# EAGLE board PushButton_RGB_w_Test_Old (EAGLE 9.6.2)

Size 100 x 80 mm. Coordinates in mm from the lower left corner, seen from the top.
Outline: 0,0 100,0 100,80 0,80 0,0
Copper layers (1*16): Top 0.035mm / dielectric 1.5mm / Bottom 0.035mm
Design rules "default *": minimum track width 6mil, minimum drill 0.35mm, track to track 6mil, track to pad 6mil, pad to pad 6mil, via to via 6mil, smd to smd 6mil, copper to edge 40mil, drill to drill 6mil, minimum pad ring 10mil, minimum via ring 8mil, stop-mask expansion 4mil, vias tented up to drill 0.5mm, thermal gap 10mil

## Footprints (pad centres in the part's own frame; a part is rotated, then mirrored left to right if it is on the bottom)
CON-HARTING-ML_ML10 = drill 0.914 pad 1.778 square: 1 -5.08,-1.27 | drill 0.914 pad 1.93 octagon: 2 -5.08,1.27; 3 -2.54,-1.27; 4 -2.54,1.27; 5 0,-1.27; 6 0,1.27; 7 2.54,-1.27; 8 2.54,1.27; 9 5.08,-1.27; 10 5.08,1.27
CON-HARTING-ML_ML6 = drill 0.914 pad 1.778 square: 1 -2.54,-1.27 | drill 0.914 pad 1.778 octagon: 2 -2.54,1.27; 3 0,-1.27; 4 0,1.27; 5 2.54,-1.27; 6 2.54,1.27
C0603 = smd 1.1 x 1: 1 -0.85,0; 2 0.85,0
D/7343-31W = smd 2.95 x 2.7: + 3.375,0; - -3.375,0
DIO_LL4148 = smd 0.6 x 1.65: A 1.95,0; C -1.95,0
SJ_2S-NO = smd 0.635 x 1.27: 1 -0.45,0; 2 0.45,0
1X02 = drill 1.016 pad 1.88: 1 0,0; 2 2.54,0
3,0 = hole 3: 0,0
SO16 = smd 0.66 x 2.032: 1 -4.445,-3.073; 2 -3.175,-3.073; 3 -1.905,-3.073; 4 -0.635,-3.073; 5 0.635,-3.073; 6 1.905,-3.073; 7 3.175,-3.073; 8 4.445,-3.073; 9 4.445,3.073; 10 3.175,3.073; 11 1.905,3.073; 12 0.635,3.073; 13 -0.635,3.073; 14 -1.905,3.073; 15 -3.175,3.073; 16 -4.445,3.073
SO14 = smd 0.66 x 2.032: 1 -3.81,-3.073; 2 -2.54,-3.073; 3 -1.27,-3.073; 4 0,-3.073; 5 1.27,-3.073; 6 2.54,-3.073; 7 3.81,-3.073; 8 3.81,3.073; 9 2.54,3.073; 10 1.27,3.073; 11 0,3.073; 12 -1.27,3.073; 13 -2.54,3.073; 14 -3.81,3.073
CON-HARTING-ML_ML08 = drill 0.914 pad 1.778 square: 1 -5.08,-1.27 | drill 0.914 pad 1.778 octagon: 2 -5.08,1.27; 3 -2.54,-1.27; 4 -2.54,1.27; 5 0,-1.27; 6 0,1.27; 7 2.54,-1.27; 8 2.54,1.27
LED3MM = drill 0.813 octagon: A -1.27,0; K 1.27,0
R0603 = smd 1 x 1.1: 1 -0.85,0; 2 0.85,0
RGBLED5050 = smd 2 x 1.1: 1 -2,1.7; 2 -2,0; 3 -2,-1.7; 4 2,-1.7; 5 2,0; 6 2,1.7
B3F-10XX_SMD = smd 2.184 x 1.067: 1 -4.55,2.25; 2 4.55,2.25; 3 -4.55,-2.25; 4 4.55,-2.25
SOP8 = smd 0.6 x 1.6: 1 -1.905,-2.6; 2 -0.635,-2.6; 3 0.635,-2.6; 4 1.905,-2.6; 5 1.905,2.6; 6 0.635,2.6; 7 -0.635,2.6; 8 -1.905,2.6

## Placement (x,y rotation side)
BUT10  [CON-HARTING-ML_ML10]  81.28,38.1 90 top
BUT+6  [CON-HARTING-ML_ML6]  1.27,-824.23 0 top  (outside the outline)
C1  100n  [C0603]  13.34,19.05 90 top
C2  100n  [C0603]  3.81,-408.94 0 top  (outside the outline)
C3  100n  [C0603]  3.81,-439.42 0 top  (outside the outline)
C4  100n  [C0603]  3.81,-469.9 0 top  (outside the outline)
C5  100n  [C0603]  3.81,-500.38 0 top  (outside the outline)
C6  100n  [C0603]  3.81,-530.86 0 top  (outside the outline)
C7  100n  [C0603]  3.81,-561.34 0 top  (outside the outline)
C8  100n  [C0603]  3.81,-591.82 0 top  (outside the outline)
C9  100n  [C0603]  3.81,-622.3 0 top  (outside the outline)
C10  100n  [C0603]  59.05,41.91 90 top
C11  100n  [C0603]  72.39,12.06 0 top
C12  100n  [C0603]  73.03,49.53 0 top
C13  100uF  [D/7343-31W]  30.48,12.7 0 top
C14  100n  [C0603]  3.81,-652.78 0 top  (outside the outline)
C15  100n  [C0603]  3.81,-683.26 0 top  (outside the outline)
C16  100n  [C0603]  3.81,-713.74 0 top  (outside the outline)
C17  100n  [C0603]  3.81,-744.22 0 top  (outside the outline)
C18  100n  [C0603]  3.81,-774.7 0 top  (outside the outline)
C19  100n  [C0603]  3.81,-805.18 0 top  (outside the outline)
D0  LL4148  [DIO_LL4148]  -3.81,-278.13 0 top  (outside the outline)
D1  LL4148  [DIO_LL4148]  -3.81,-284.48 0 top  (outside the outline)
D2  LL4148  [DIO_LL4148]  -3.81,-290.83 0 top  (outside the outline)
D3  LL4148  [DIO_LL4148]  -3.81,-297.18 0 top  (outside the outline)
D4  LL4148  [DIO_LL4148]  -3.81,-303.53 0 top  (outside the outline)
D5  LL4148  [DIO_LL4148]  -3.81,-309.88 0 top  (outside the outline)
D6  LL4148  [DIO_LL4148]  -3.81,-316.23 0 top  (outside the outline)
D7  LL4148  [DIO_LL4148]  -3.81,-322.58 0 top  (outside the outline)
D8  LL4148  [DIO_LL4148]  -3.81,-328.93 0 top  (outside the outline)
D9  LL4148  [DIO_LL4148]  -3.81,-335.28 0 top  (outside the outline)
D10  LL4148  [DIO_LL4148]  -3.81,-341.63 0 top  (outside the outline)
D11  LL4148  [DIO_LL4148]  -3.81,-347.98 0 top  (outside the outline)
D12  LL4148  [DIO_LL4148]  -3.81,-354.33 0 top  (outside the outline)
D13  LL4148  [DIO_LL4148]  -3.81,-360.68 0 top  (outside the outline)
D14  LL4148  [DIO_LL4148]  -3.81,-367.03 0 top  (outside the outline)
D15  LL4148  [DIO_LL4148]  -3.81,-373.38 0 top  (outside the outline)
D16  LL4148  [DIO_LL4148]  -3.81,-379.73 0 top  (outside the outline)
D17  LL4148  [DIO_LL4148]  -3.81,-831.85 0 top  (outside the outline)
D18  LL4148  [DIO_LL4148]  -3.81,-838.2 0 top  (outside the outline)
D19  LL4148  [DIO_LL4148]  -3.81,-844.55 0 top  (outside the outline)
D20  LL4148  [DIO_LL4148]  -3.81,-850.9 0 top  (outside the outline)
D21  LL4148  [DIO_LL4148]  -3.81,-857.25 0 top  (outside the outline)
D22  LL4148  [DIO_LL4148]  -3.81,-863.6 0 top  (outside the outline)
D23  LL4148  [DIO_LL4148]  -3.81,-869.95 0 top  (outside the outline)
D24  LL4148  [DIO_LL4148]  -3.81,-876.3 0 top  (outside the outline)
D25  LL4148  [DIO_LL4148]  -3.81,-882.65 0 top  (outside the outline)
D26  LL4148  [DIO_LL4148]  -3.81,-889 0 top  (outside the outline)
D27  LL4148  [DIO_LL4148]  -3.81,-895.35 0 top  (outside the outline)
D28  LL4148  [DIO_LL4148]  -3.81,-901.7 0 top  (outside the outline)
D29  LL4148  [DIO_LL4148]  -3.81,-908.05 0 top  (outside the outline)
D30  LL4148  [DIO_LL4148]  -3.81,-914.4 0 top  (outside the outline)
D31  LL4148  [DIO_LL4148]  -3.81,-920.75 0 top  (outside the outline)
D32  LL4148  [DIO_LL4148]  -3.81,-927.1 0 top  (outside the outline)
END  SOLDERJUMPERNO  [SJ_2S-NO]  5.08,35.56 180 top
END1  SOLDERJUMPERNO  [SJ_2S-NO]  5.08,27.94 0 top
END1_PIN  END1  [1X02]  3.81,30.48 0 top
END_PIN  END  [1X02]  6.35,38.1 180 top
H1  MOUNT-HOLE3.0  [3,0]  5.08,5.37 0 top
H2  MOUNT-HOLE3.0  [3,0]  4.45,53.98 0 top
H3  MOUNT-HOLE3.0  [3,0]  81.92,53.98 0 top
H4  MOUNT-HOLE3.0  [3,0]  81.28,3.81 0 top
IC1  4017D  [SO16]  72.39,42.55 90 top
IC2  4011D  [SO14]  72.39,19.05 90 top
IC3  4017D  [SO16]  1.27,-251.46 0 top  (outside the outline)
INP  [CON-HARTING-ML_ML08]  5.08,20.32 90 top
LED1  green  [LED3MM]  20.1,12.7 0 top
OUTP  [CON-HARTING-ML_ML08]  81.28,20.32 90 top
R1  470  [R0603]  13.34,15.24 270 top
R2  470  [R0603]  10.16,-408.94 0 top  (outside the outline)
R3  470  [R0603]  10.16,-439.42 0 top  (outside the outline)
R4  470  [R0603]  10.16,-469.9 0 top  (outside the outline)
R5  470  [R0603]  10.16,-500.38 0 top  (outside the outline)
R6  470  [R0603]  10.16,-530.86 0 top  (outside the outline)
R7  470  [R0603]  10.16,-561.34 0 top  (outside the outline)
R8  470  [R0603]  10.16,-591.82 0 top  (outside the outline)
R9  470  [R0603]  10.16,-622.3 0 top  (outside the outline)
R10  470  [R0603]  59.05,38.1 270 top
R11  470  [R0603]  10.16,-652.78 0 top  (outside the outline)
R12  470  [R0603]  10.16,-683.26 0 top  (outside the outline)
R13  470  [R0603]  10.16,-713.74 0 top  (outside the outline)
R14  470  [R0603]  10.16,-744.22 0 top  (outside the outline)
R15  470  [R0603]  10.16,-774.7 0 top  (outside the outline)
R16  470  [R0603]  10.16,-805.18 0 top  (outside the outline)
R20  470  [R0603]  14.82,12.7 0 top
RGB1  RGBLED5050  [RGBLED5050]  20.19,5.58 90 top
RGB2  RGBLED5050  [RGBLED5050]  -3.81,-401.32 0 top  (outside the outline)
RGB3  RGBLED5050  [RGBLED5050]  -3.81,-431.8 0 top  (outside the outline)
RGB4  RGBLED5050  [RGBLED5050]  -3.81,-462.28 0 top  (outside the outline)
RGB5  RGBLED5050  [RGBLED5050]  -3.81,-492.76 0 top  (outside the outline)
RGB6  RGBLED5050  [RGBLED5050]  -3.81,-523.24 0 top  (outside the outline)
RGB7  RGBLED5050  [RGBLED5050]  -3.81,-553.72 0 top  (outside the outline)
RGB8  RGBLED5050  [RGBLED5050]  -3.81,-584.2 0 top  (outside the outline)
RGB9  RGBLED5050  [RGBLED5050]  -3.81,-614.68 0 top  (outside the outline)
RGB10  RGBLED5050  [RGBLED5050]  69.85,67.31 270 top
RGB11  RGBLED5050  [RGBLED5050]  -3.81,-645.16 0 top  (outside the outline)
RGB12  RGBLED5050  [RGBLED5050]  -3.81,-675.64 0 top  (outside the outline)
RGB13  RGBLED5050  [RGBLED5050]  -3.81,-706.12 0 top  (outside the outline)
RGB14  RGBLED5050  [RGBLED5050]  -3.81,-736.6 0 top  (outside the outline)
RGB15  RGBLED5050  [RGBLED5050]  -3.81,-767.08 0 top  (outside the outline)
RGB16  RGBLED5050  [RGBLED5050]  -3.81,-797.56 0 top  (outside the outline)
S1  [B3F-10XX_SMD]  13.58,5.41 90 top
S2  [B3F-10XX_SMD]  11.43,-401.32 0 top  (outside the outline)
S3  [B3F-10XX_SMD]  11.43,-431.8 0 top  (outside the outline)
S4  [B3F-10XX_SMD]  11.43,-462.28 0 top  (outside the outline)
S5  [B3F-10XX_SMD]  11.43,-492.76 0 top  (outside the outline)
S6  [B3F-10XX_SMD]  11.43,-523.24 0 top  (outside the outline)
S7  [B3F-10XX_SMD]  11.43,-553.72 0 top  (outside the outline)
S8  [B3F-10XX_SMD]  11.43,-584.2 0 top  (outside the outline)
S9  [B3F-10XX_SMD]  11.43,-614.68 0 top  (outside the outline)
S10  [B3F-10XX_SMD]  63.5,67.31 90 top
S11  [B3F-10XX_SMD]  11.43,-645.16 0 top  (outside the outline)
S12  [B3F-10XX_SMD]  11.43,-675.64 0 top  (outside the outline)
S13  [B3F-10XX_SMD]  11.43,-706.12 0 top  (outside the outline)
S14  [B3F-10XX_SMD]  11.43,-736.6 0 top  (outside the outline)
S15  [B3F-10XX_SMD]  11.43,-767.08 0 top  (outside the outline)
S16  [B3F-10XX_SMD]  11.43,-797.56 0 top  (outside the outline)
SV1  [CON-HARTING-ML_ML6]  17.14,27.94 270 top
SV2  [CON-HARTING-ML_ML6]  1.27,-391.16 0 top  (outside the outline)
SV3  [CON-HARTING-ML_ML6]  1.27,-421.64 0 top  (outside the outline)
SV4  [CON-HARTING-ML_ML6]  1.27,-452.12 0 top  (outside the outline)
SV5  [CON-HARTING-ML_ML6]  1.27,-482.6 0 top  (outside the outline)
SV6  [CON-HARTING-ML_ML6]  1.27,-513.08 0 top  (outside the outline)
SV7  [CON-HARTING-ML_ML6]  1.27,-543.56 0 top  (outside the outline)
SV8  [CON-HARTING-ML_ML6]  1.27,-574.04 0 top  (outside the outline)
SV9  [CON-HARTING-ML_ML6]  1.27,-604.52 0 top  (outside the outline)
SV10  [CON-HARTING-ML_ML6]  62.87,49.53 270 top
SV11  [CON-HARTING-ML_ML6]  1.27,-635 0 top  (outside the outline)
SV12  [CON-HARTING-ML_ML6]  1.27,-665.48 0 top  (outside the outline)
SV13  [CON-HARTING-ML_ML6]  1.27,-695.96 0 top  (outside the outline)
SV14  [CON-HARTING-ML_ML6]  1.27,-726.44 0 top  (outside the outline)
SV15  [CON-HARTING-ML_ML6]  1.27,-756.92 0 top  (outside the outline)
SV16  [CON-HARTING-ML_ML6]  1.27,-787.4 0 top  (outside the outline)
SW0  [1X02]  -5.08,-814.07 0 top  (outside the outline)
TST_LED  SOLDERJUMPERNO  [SJ_2S-NO]  -5.08,-245.11 0 top  (outside the outline)
TST_LED1  Tst_LED  [1X02]  -5.08,-238.76 0 top  (outside the outline)
U1  [SOP8]  17.78,19.05 180 top
U2  [SOP8]  -1.27,-410.21 0 top  (outside the outline)
U3  [SOP8]  -1.27,-440.69 0 top  (outside the outline)
U4  [SOP8]  -1.27,-471.17 0 top  (outside the outline)
U5  [SOP8]  -1.27,-501.65 0 top  (outside the outline)
U6  [SOP8]  -1.27,-532.13 0 top  (outside the outline)
U7  [SOP8]  -1.27,-562.61 0 top  (outside the outline)
U8  [SOP8]  -1.27,-593.09 0 top  (outside the outline)
U9  [SOP8]  -1.27,-623.57 0 top  (outside the outline)
U10  [SOP8]  63.5,41.27 180 top
U11  [SOP8]  -1.27,-654.05 0 top  (outside the outline)
U12  [SOP8]  -1.27,-684.53 0 top  (outside the outline)
U13  [SOP8]  -1.27,-715.01 0 top  (outside the outline)
U14  [SOP8]  -1.27,-745.49 0 top  (outside the outline)
U15  [SOP8]  -1.27,-775.97 0 top  (outside the outline)
U16  [SOP8]  -1.27,-806.45 0 top  (outside the outline)

## Library data of the parts
BUT10 INP OUTP = PushButtonAction_4017_2; OC_FARNELL: unknown; OC_NEWARK: unknown
BUT+6 SV1-SV16 = PushButtonAction_4017_4; OC_FARNELL: unknown; OC_NEWARK: unknown
C1-C19 = rcl; SPICEPREFIX: C
D0 D1-D32 = LL4148; AVAILABILITY: In Stock; DESCRIPTION: Diode Standard 75V 300mA (DC) Surface Mount Mini MELF/DL-35; MF: ON; MP: LL4148; PACKAGE: SOD-80 Fairchild Semiconductor; PRICE: None
END END1 TST_LED = SparkFun-Retired
END1_PIN END_PIN SW0 TST_LED1 = SparkFun-Connectors
H1-H4 = holes
IC1 IC3 = 40xx
IC2 = 40xx; SPICEPREFIX: J
LED1 = led
R1-R16 R20 = rcl; SPICEPREFIX: R
RGB1-RGB16 = adafruit
S1-S16 = switch-omron
U1-U16 = S3PO_Modul_WS2811

## Nets
+5V: C11.1 C12.1 C13.+ IC1.16 IC2.14 IC3.16 INP.3 OUTP.3 R1.2 R2.2 R3.2 R4.2 R5.2 R6.2 R7.2 R8.2 R9.2 R10.2 R11.2 R12.2 R13.2 R14.2 R15.2 R16.2 R20.2 SV1.1 SV2.1 SV3.1 SV4.1 SV5.1 SV6.1 SV7.1 SV8.1 SV9.1 SV10.1 SV11.1 SV12.1 SV13.1 SV14.1 SV15.1 SV16.1 TST_LED1.2 TST_LED.1
BUTTONS: INP.7 OUTP.7 S1.1 S1.2 S2.2 S3.2 S4.2 S5.2 S6.2 S7.2 S8.2 S9.2 S10.2 S11.2 S12.2 S13.2 S14.2 S15.2 S16.2 SV1.2 SV2.2 SV3.2 SV4.2 SV5.2 SV6.2 SV7.2 SV8.2 SV9.2 SV10.2 SV11.2 SV12.2 SV13.2 SV14.2 SV15.2 SV16.2 SW0.1
CLK_IN: IC1.14 IC2.2 INP.5
CLK_NEXT_CHAIN: END1.2 END1_PIN.1 INP.8 OUTP.8
CLK_OUT: END1.1 END1_PIN.2 IC2.11 OUTP.5
DIN: INP.1 U1.6
GND: C1.2 C2.2 C3.2 C4.2 C5.2 C6.2 C7.2 C8.2 C9.2 C10.2 C11.2 C12.2 C13.- C14.2 C15.2 C16.2 C17.2 C18.2 C19.2 IC1.8 IC2.7 IC3.8 INP.4 LED1.K OUTP.4 U1.4 U2.4 U3.4 U4.4 U5.4 U6.4 U7.4 U8.4 U9.4 U10.4 U11.4 U12.4 U13.4 U14.4 U15.4 U16.4
N$1: IC2.3 IC2.5 IC2.6
N$2: U10.5 U11.6
N$3: BUT+6.1 D9.A IC3.2
N$4: U1.5 U2.6
N$5: BUT10.10 IC1.11 IC1.13 IC2.1
N$6: C2.1 R2.1 U2.8
N$7: D0.C SW0.2
N$8: RGB2.4 SV2.4 U2.3
N$9: RGB2.6 SV2.6 U2.1
N$10: RGB2.5 SV2.3 U2.2
N$11: BUT10.2 D1.A IC1.2
N$12: BUT10.3 D2.A IC1.4
N$13: BUT10.4 D3.A IC1.7
N$14: BUT10.5 D4.A IC1.10
N$15: BUT10.6 D5.A IC1.1
N$16: BUT10.7 D6.A IC1.5
N$17: BUT10.8 D7.A IC1.6
N$18: BUT10.9 D8.A IC1.9
N$19: RGB1.5 SV1.3 U1.2
N$20: D18.A D20.A D22.A D24.A D26.A D28.A D30.A D32.A TST_LED1.1 TST_LED.2
N$21: LED1.A R20.1
N$22: D17.A D18.C
N$23: S2.1
N$24: U2.5 U3.6
N$25: D10.C S10.3 S10.4 SV10.5
N$26: RGB1.4 SV1.4 U1.3
N$27: RGB1.6 SV1.6 U1.1
N$28: BUT+6.2 D10.A IC3.4
N$29: BUT+6.3 D11.A IC3.7
N$30: BUT+6.4 D12.A IC3.10
N$31: BUT+6.5 D13.A IC3.1
N$33: BUT+6.6 D14.A IC3.5
N$35: BUT10.1 D0.A IC1.3
N$36: D15.A IC3.6
N$37: D16.A IC3.9
N$38: IC2.10 IC2.12 IC2.13
N$39: D19.A D20.C
N$40: IC2.8 IC3.11 IC3.13
N$41: IC2.4 IC2.9 IC3.14
N$43: D21.A D22.C
N$45: C3.1 R3.1 U3.8
N$46: D3.C S3.3 S3.4 SV3.5
N$47: RGB3.4 SV3.4 U3.3
N$48: RGB3.6 SV3.6 U3.1
N$49: RGB3.5 SV3.3 U3.2
N$50: D19.C RGB3.1 RGB3.2 RGB3.3 RGB4.1 RGB4.2 RGB4.3
N$51: S3.1
N$52: U3.5 U4.6
N$53: D23.A D24.C
N$55: D25.A D26.C
N$56: C4.1 R4.1 U4.8
N$58: RGB4.4 SV4.4 U4.3
N$59: RGB4.6 SV4.6 U4.1
N$60: RGB4.5 SV4.3 U4.2
N$62: S4.1
N$63: U4.5 U5.6
N$64: D27.A D28.C
N$66: D29.A D30.C
N$67: C5.1 R5.1 U5.8
N$69: RGB5.4 SV5.4 U5.3
N$70: RGB5.6 SV5.6 U5.1
N$71: RGB5.5 SV5.3 U5.2
N$72: D21.C RGB5.1 RGB5.2 RGB5.3 RGB6.1 RGB6.2 RGB6.3
N$73: S5.1
N$74: D31.A D32.C
N$75: U5.5 U6.6
N$76: C1.1 R1.1 U1.8
N$80: C6.1 R6.1 U6.8
N$82: RGB6.4 SV6.4 U6.3
N$83: RGB6.6 SV6.6 U6.1
N$84: RGB6.5 SV6.3 U6.2
N$86: S6.1
N$87: U6.5 U7.6
N$91: C7.1 R7.1 U7.8
N$93: C10.1 R10.1 U10.8
N$95: END.2 END_PIN.1 OUTP.1
N$96: RGB7.4 SV7.4 U7.3
N$97: RGB7.6 SV7.6 U7.1
N$98: RGB7.5 SV7.3 U7.2
N$99: D23.C RGB7.1 RGB7.2 RGB7.3 RGB8.1 RGB8.2 RGB8.3
N$100: S7.1
N$101: U7.5 U8.6
N$105: C8.1 R8.1 U8.8
N$107: RGB8.4 SV8.4 U8.3
N$108: RGB8.6 SV8.6 U8.1
N$109: RGB8.5 SV8.3 U8.2
N$111: S8.1
N$112: U8.5 U9.6
N$116: RGB10.4 SV10.4 U10.3
N$117: RGB10.6 SV10.6 U10.1
N$118: RGB10.5 SV10.3 U10.2
N$119: C15.1 R12.1 U12.8
N$120: D1.C S1.3 S1.4 SV1.5
N$121: D2.C S2.3 S2.4 SV2.5
N$123: D4.C S4.3 S4.4 SV4.5
N$124: D5.C S5.3 S5.4 SV5.5
N$125: D6.C S6.3 S6.4 SV6.5
N$126: D7.C S7.3 S7.4 SV7.5
N$127: D8.C S8.3 S8.4 SV8.5
N$128: C9.1 R9.1 U9.8
N$129: D17.C RGB1.1 RGB1.2 RGB1.3 RGB2.1 RGB2.2 RGB2.3
N$130: D12.C S12.3 S12.4 SV12.5
N$132: D9.C S9.3 S9.4 SV9.5
N$133: S10.1
N$134: RGB12.4 SV12.4 U12.3
N$136: RGB9.4 SV9.4 U9.3
N$137: RGB9.6 SV9.6 U9.1
N$138: RGB9.5 SV9.3 U9.2
N$139: D25.C RGB9.1 RGB9.2 RGB9.3 RGB10.1 RGB10.2 RGB10.3
N$140: S9.1
N$141: U9.5 U10.6
N$145: C14.1 R11.1 U11.8
N$146: D11.C S11.3 S11.4 SV11.5
N$147: RGB11.4 SV11.4 U11.3
N$148: RGB11.6 SV11.6 U11.1
N$149: RGB11.5 SV11.3 U11.2
N$151: S11.1
N$152: U11.5 U12.6
N$155: RGB12.6 SV12.6 U12.1
N$156: RGB12.5 SV12.3 U12.2
N$157: D27.C RGB11.1 RGB11.2 RGB11.3 RGB12.1 RGB12.2 RGB12.3
N$158: S12.1
N$159: U12.5 U13.6
N$163: C16.1 R13.1 U13.8
N$164: D13.C S13.3 S13.4 SV13.5
N$165: RGB13.4 SV13.4 U13.3
N$166: RGB13.6 SV13.6 U13.1
N$167: RGB13.5 SV13.3 U13.2
N$168: D29.C RGB13.1 RGB13.2 RGB13.3 RGB14.1 RGB14.2 RGB14.3
N$169: S13.1
N$170: U13.5 U14.6
N$174: C17.1 R14.1 U14.8
N$175: D14.C S14.3 S14.4 SV14.5
N$176: RGB14.4 SV14.4 U14.3
N$177: RGB14.6 SV14.6 U14.1
N$178: RGB14.5 SV14.3 U14.2
N$180: S14.1
N$181: U14.5 U15.6
N$185: C18.1 R15.1 U15.8
N$186: D15.C S15.3 S15.4 SV15.5
N$187: RGB15.4 SV15.4 U15.3
N$188: RGB15.6 SV15.6 U15.1
N$189: RGB15.5 SV15.3 U15.2
N$190: D31.C RGB15.1 RGB15.2 RGB15.3 RGB16.1 RGB16.2 RGB16.3
N$191: S15.1
N$192: U15.5 U16.6
N$196: C19.1 R16.1 U16.8
N$197: D16.C S16.3 S16.4 SV16.5
N$198: RGB16.4 SV16.4 U16.3
N$199: RGB16.6 SV16.6 U16.1
N$200: RGB16.5 SV16.3 U16.2
N$202: S16.1
N$203: U16.5
RESET: IC1.15 IC3.15 INP.6 OUTP.6
RETURN: END.1 END_PIN.2 INP.2 OUTP.2

## Tracks (layer width: path | path; a pad name or v marks a point on that pad's centre or on a via)
+5V  (42 unrouted)
BUTTONS  (35 unrouted)
CLK_IN  (2 unrouted)
CLK_NEXT_CHAIN  (3 unrouted)
CLK_OUT  (3 unrouted)
DIN  (1 unrouted)
GND  (40 unrouted)
N$1  (2 unrouted)
N$2  (1 unrouted)
N$3  (2 unrouted)
N$4  (1 unrouted)
N$5  (3 unrouted)
N$6  (2 unrouted)
N$7  (1 unrouted)
N$8  (2 unrouted)
N$9  (2 unrouted)
N$10  (2 unrouted)
N$11  (2 unrouted)
N$12  (2 unrouted)
N$13  (2 unrouted)
N$14  (2 unrouted)
N$15  (2 unrouted)
N$16  (2 unrouted)
N$17  (2 unrouted)
N$18  (2 unrouted)
N$19  (2 unrouted)
N$20  (9 unrouted)
N$21  (1 unrouted)
N$22  (1 unrouted)
N$24  (1 unrouted)
N$25  (3 unrouted)
N$26  (2 unrouted)
N$27  (2 unrouted)
N$28  (2 unrouted)
N$29  (2 unrouted)
N$30  (2 unrouted)
N$31  (2 unrouted)
N$33  (2 unrouted)
N$35  (2 unrouted)
N$36  (1 unrouted)
N$37  (1 unrouted)
N$38  (2 unrouted)
N$39  (1 unrouted)
N$40  (2 unrouted)
N$41  (2 unrouted)
N$43  (1 unrouted)
N$45  (2 unrouted)
N$46  (3 unrouted)
N$47  (2 unrouted)
N$48  (2 unrouted)
N$49  (2 unrouted)
N$50  (6 unrouted)
N$52  (1 unrouted)
N$53  (1 unrouted)
N$55  (1 unrouted)
N$56  (2 unrouted)
N$58  (2 unrouted)
N$59  (2 unrouted)
N$60  (2 unrouted)
N$63  (1 unrouted)
N$64  (1 unrouted)
N$66  (1 unrouted)
N$67  (2 unrouted)
N$69  (2 unrouted)
N$70  (2 unrouted)
N$71  (2 unrouted)
N$72  (6 unrouted)
N$74  (1 unrouted)
N$75  (1 unrouted)
N$76  (2 unrouted)
N$80  (2 unrouted)
N$82  (2 unrouted)
N$83  (2 unrouted)
N$84  (2 unrouted)
N$87  (1 unrouted)
N$91  (2 unrouted)
N$93  (2 unrouted)
N$95  (2 unrouted)
N$96  (2 unrouted)
N$97  (2 unrouted)
N$98  (2 unrouted)
N$99  (6 unrouted)
N$101  (1 unrouted)
N$105  (2 unrouted)
N$107  (2 unrouted)
N$108  (2 unrouted)
N$109  (2 unrouted)
N$112  (1 unrouted)
N$116  (2 unrouted)
N$117  (2 unrouted)
N$118  (2 unrouted)
N$119  (2 unrouted)
N$120  (3 unrouted)
N$121  (3 unrouted)
N$123  (3 unrouted)
N$124  (3 unrouted)
N$125  (3 unrouted)
N$126  (3 unrouted)
N$127  (3 unrouted)
N$128  (2 unrouted)
N$129  (6 unrouted)
N$130  (3 unrouted)
N$132  (3 unrouted)
N$134  (2 unrouted)
N$136  (2 unrouted)
N$137  (2 unrouted)
N$138  (2 unrouted)
N$139  (6 unrouted)
N$141  (1 unrouted)
N$145  (2 unrouted)
N$146  (3 unrouted)
N$147  (2 unrouted)
N$148  (2 unrouted)
N$149  (2 unrouted)
N$152  (1 unrouted)
N$155  (2 unrouted)
N$156  (2 unrouted)
N$157  (6 unrouted)
N$159  (1 unrouted)
N$163  (2 unrouted)
N$164  (3 unrouted)
N$165  (2 unrouted)
N$166  (2 unrouted)
N$167  (2 unrouted)
N$168  (6 unrouted)
N$170  (1 unrouted)
N$174  (2 unrouted)
N$175  (3 unrouted)
N$176  (2 unrouted)
N$177  (2 unrouted)
N$178  (2 unrouted)
N$181  (1 unrouted)
N$185  (2 unrouted)
N$186  (3 unrouted)
N$187  (2 unrouted)
N$188  (2 unrouted)
N$189  (2 unrouted)
N$190  (6 unrouted)
N$192  (1 unrouted)
N$196  (2 unrouted)
N$197  (3 unrouted)
N$198  (2 unrouted)
N$199  (2 unrouted)
N$200  (2 unrouted)
RESET  (3 unrouted)
RETURN  (3 unrouted)

## Text on the board
bPlace: https://www.stummiforum.de/viewtopic.php?f=7&t=165060 | https://wiki.mobaledlib.de
tNames: 19.11.2022 | https://www.stummiforum.de/viewtopic.php?f=7&t=165060 | Version V 1.2 | https://wiki.mobaledlib.de | by Hardi und / Jürgen (fromue) | Pusch-Button RGB | +
bNames: Push-Button RGB | Version V 1.2 | by Hardi und Jürgen (fromue)